# Altium PCB 单片机控制电路.PcbDoc
Units mil, origin at the board's own origin, x right, y up, seen from the top; angles counter-clockwise.
Board outline 4500 x 6000 mil, 2 copper layers (Top Layer, Bottom Layer); 28 components, 42 nets, 117 pads, 3 vias.
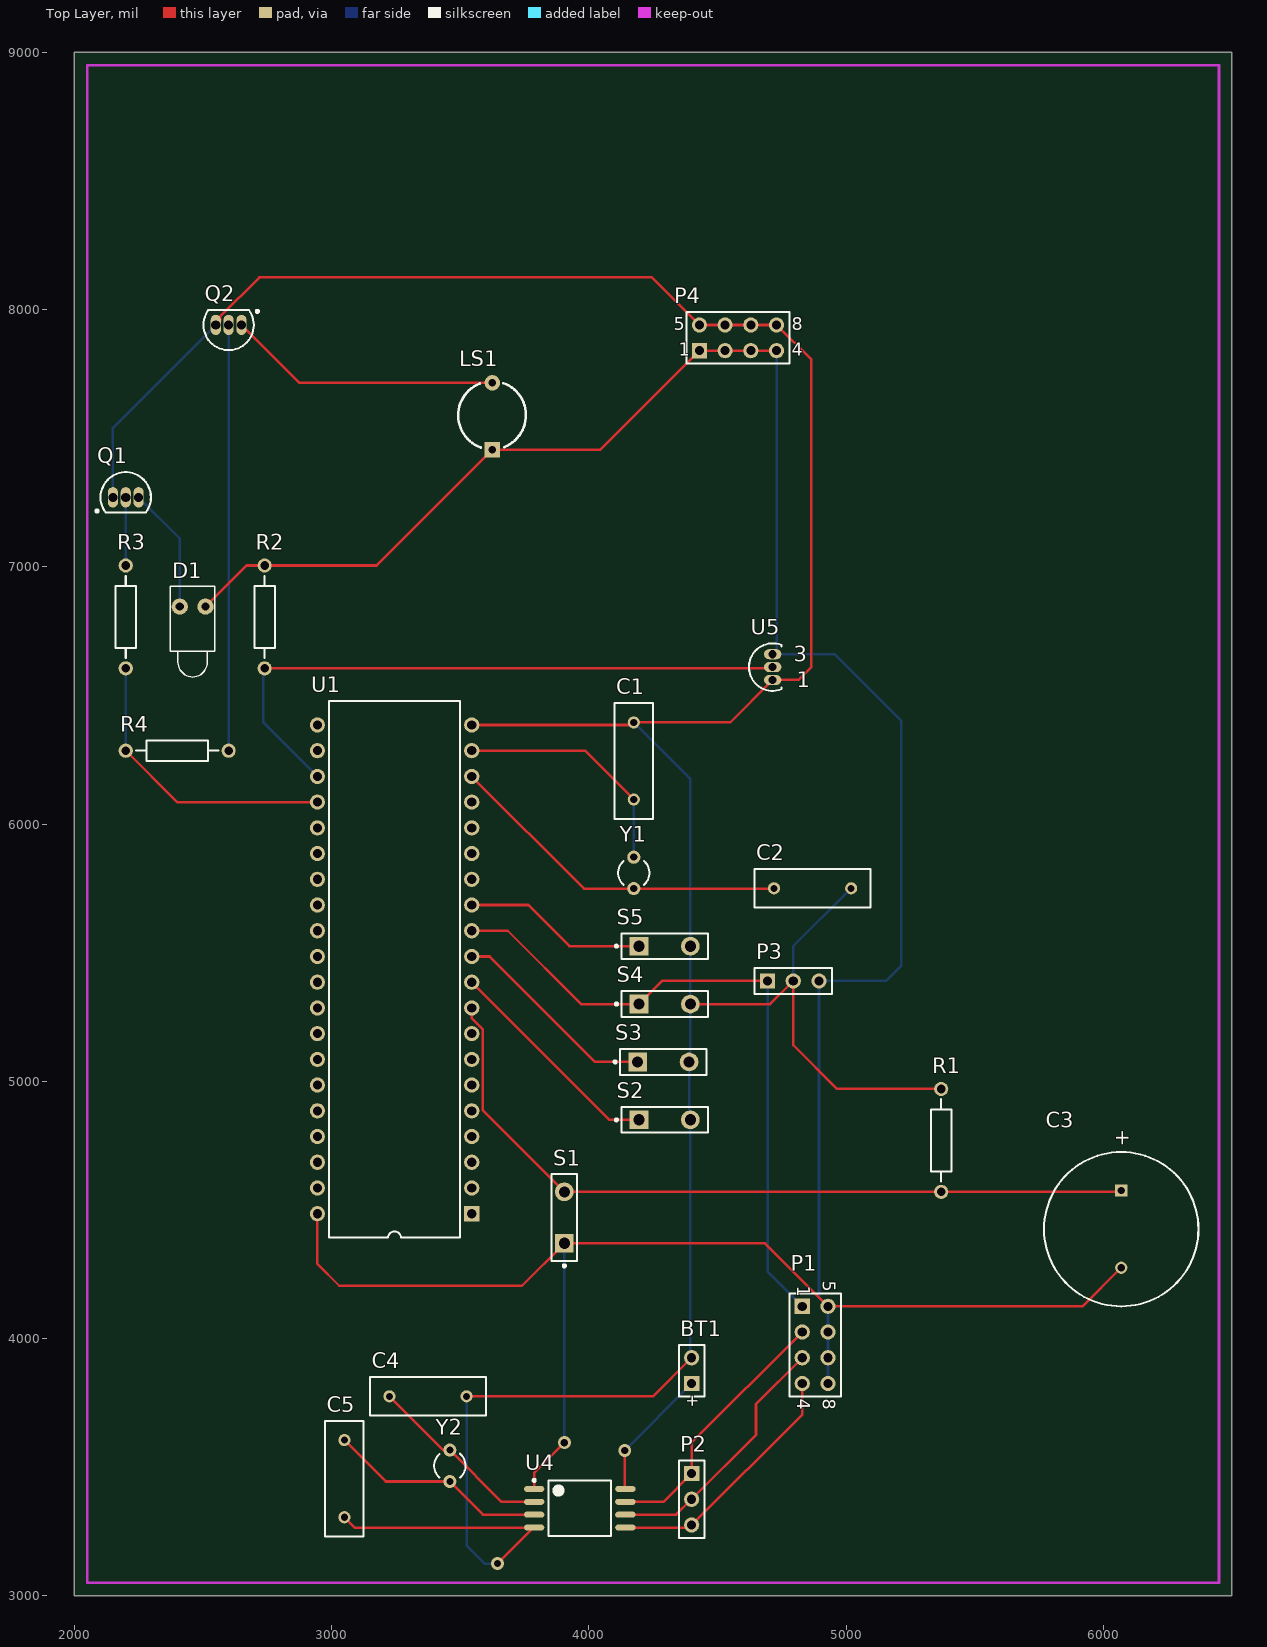
[diagram p0: Top Layer view]
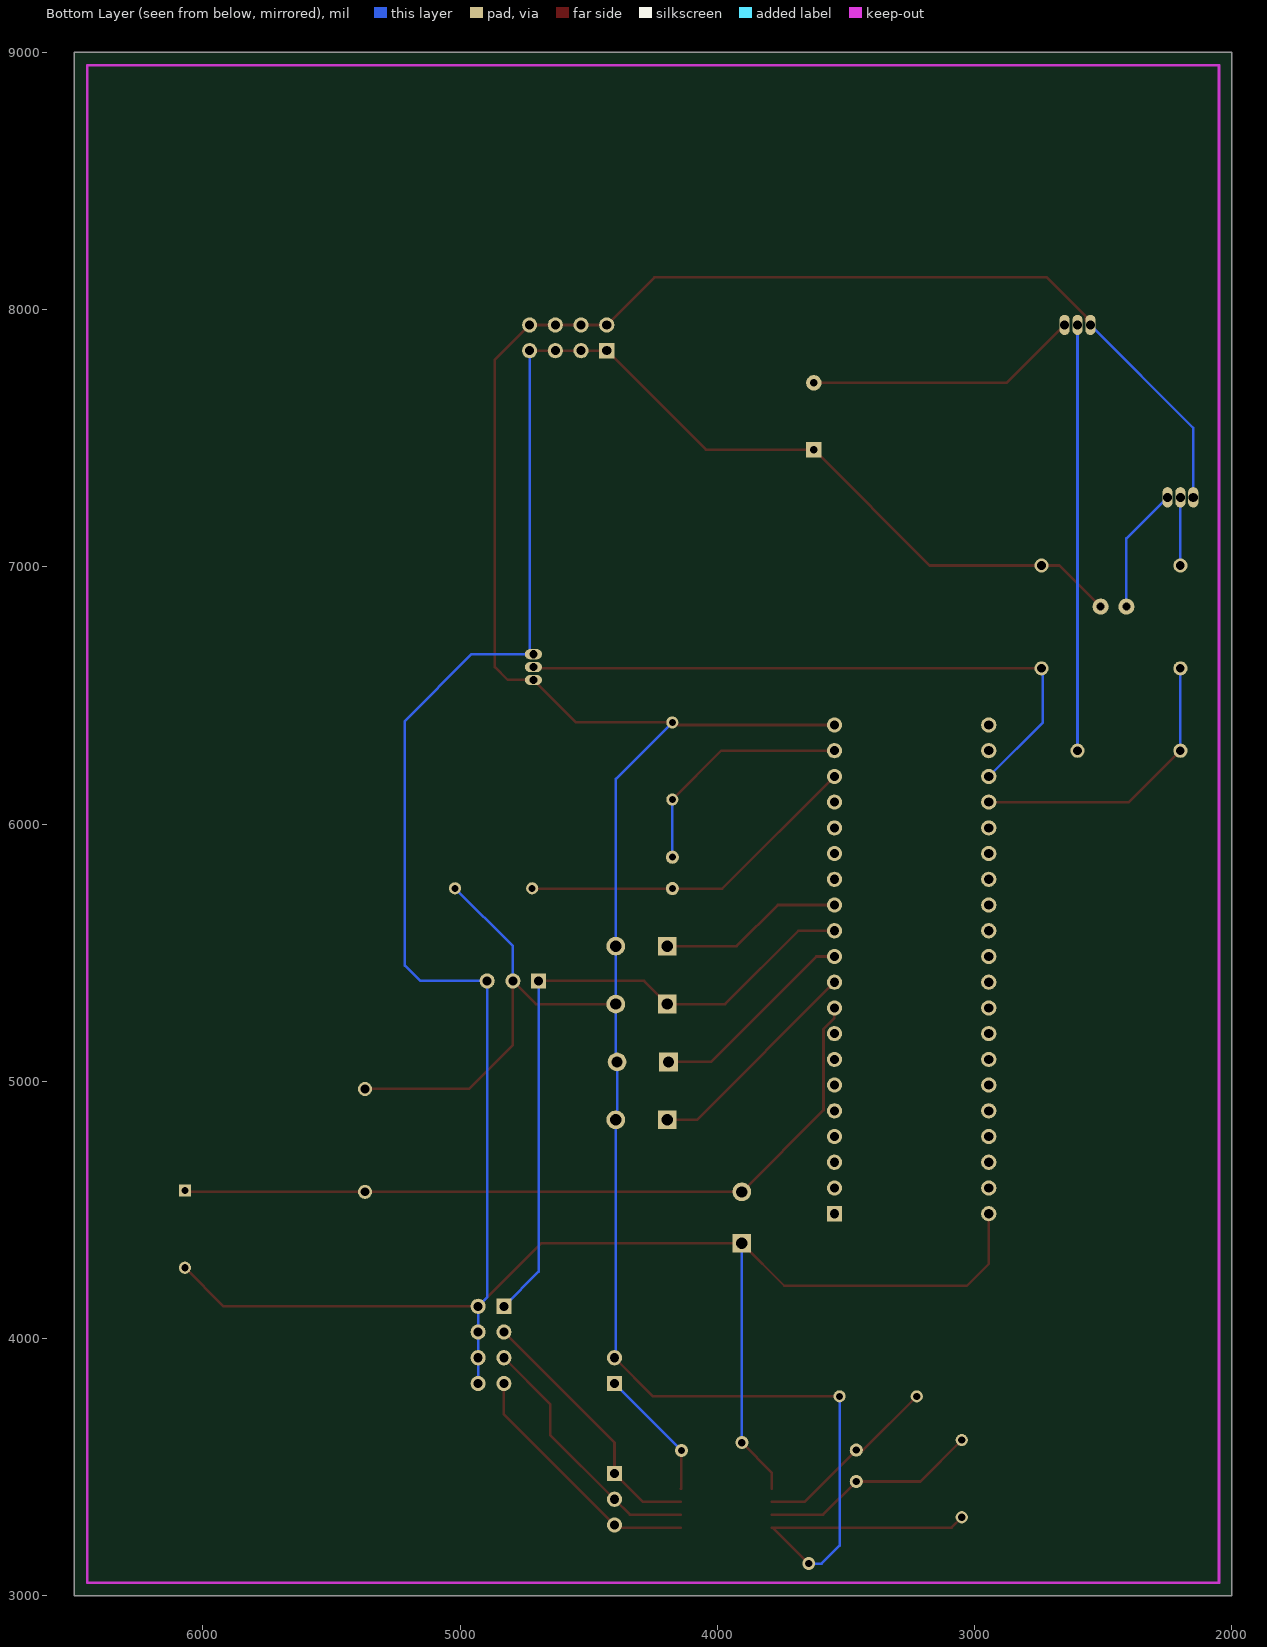
[diagram p1: Bottom Layer view, seen from below]

## Layer stack, top to bottom
Top Solder: solder mask 0.4, Solder Resist, Dk 3.5
Top Layer: signal copper 1.4
Dielectric 1: dielectric 12.6, FR-4, Dk 4.8
Bottom Layer: signal copper 1.4
Bottom Solder: solder mask 0.4, Solder Resist, Dk 3.5

## Board outline
2000,3000 6500,3000 6500,9000 2000,9000

## Design rules (kind name [scope] priority, off if disabled: settings)
Clearance [All] p1: gap=8
PolygonConnect [All] p1: connectstyle=Relief reliefconductorwidth=10 reliefentries=4 polygonreliefangle="90 Angle" airgapwidth=10
RoutingVias [All] p1: holewidth=28 width=50 viastyle="Through Hole" minholewidth=28 minwidth=50 maxholewidth=28 maxwidth=50
SolderMaskExpansion [All] p1: expansion=4
Width [All] p1: maxlimit=10 minlimit=10 preferedwidth=10
30 further rules are at their usual default settings.

## Classes and differential pairs
net class WE[1..8]: WE1 WE2 WE3 WE4 WE5 WE6 WE7 WE8
component class U_蜂鸣器: LS1 P4 Q2 R4
component class U_红外接收模块: P3
component class U_红外发射模块: D1 Q1 R3
component class U_独立按键: S2 S3 S4 S5
component class U_温度传感器模块: R2 U5
component class U_最小系统: C1 C2 C3 R1 S1 U1 Y1
component class U_时钟电路: BT1 C4 C5 P1 P2 U4 Y2

## Components (designator, comment, footprint, x,y, rotation, side; value= is the part's Value field where it differs from the comment)
BT1 "Battery" BAT-2 4400,3875 r90 top
C1 "Cap" RAD-0.3 4175,6245 r270 top
C2 "Cap" RAD-0.3 4870,5750 r180 top
C3 "Cap Pol1" RB7.6-15 6070,4425 r90 top
C4 "Cap" RAD-0.3 3375,3775 r0 top
C5 "Cap" RAD-0.3 3050,3455 r90 top
D1 "LED1" LED-1 2460,6845 r270 top
LS1 "Buzzer_有源" DIP6.6_2P 3625,7455 r90 top
P1 "Header 4X2A" HDR2X4_CEN 4830,4125 r270 top
P2 "Header 3" HDR1X3 4400,3475 r270 top
P3 "Header 3" HDR1X3 4695,5390 r0 top
P4 "Header 4X2A" HDR2X4_CEN 4430,7840 r0 top
Q1 "2N3904" TO-92A 2200,7270 r270 top
Q2 "2N3906" TO-92A 2600,7940 r90 top
R1 "Res2" AXIAL-0.4 5370,4770 r270 top
R2 "Res2" AXIAL-0.4 2740,6805 r90 top
R3 "Res2" AXIAL-0.4 2200,6805 r90 top
R4 "Res2" AXIAL-0.4 2400,6285 r0 top
S1 "SW-PB" SPST-2 3905,4470 r90 top
S2 "SW-PB" SPST-2 4295,4850 r0 top
S3 "SW-PB" SPST-2 4290,5075 r0 top
S4 "SW-PB" SPST-2 4295,5300 r0 top
S5 "SW-PB" SPST-2 4295,5525 r0 top
U1 "P89C52X2BN" SOT129-1 3245,5435 r90 top
U4 "DS1302" SOIC127P1030-8L 3965,3340 r0 top
U5 "DS1820" PR35 4715,6610 r0 top
Y1 "XTAL" R38 4175,5810 r0 top
Y2 "XTAL" R38 3460,3505 r180 top

## Footprints (in the part's own frame and the unit in brackets; to place one, negate y for a bottom-side part, rotate by r counter-clockwise, add the part's x,y. Pads: shape width x height; smd on the part's side, far side on the other; paste and mask are expansions set on the pad)
AXIAL-0.4 [mm] "Axial Device, Thru-Hole; 2 Leads; 0.4 in Pin Spacing"
  round 1.4 hole 0.85: 1(-5.08,0) 2(5.08,0)
  silkscreen extent -4.06,-1.02 4.06,1.02
BAT-2 [mm] "Battery; 2 Leads"
  rect 1.5x1.5 hole 0.9: 1(-1.27,0)
  round 1.5 hole 0.9: 2(1.27,0)
  silkscreen extent -2.54,-1.27 2.54,1.27
DIP6.6_2P [mil]
  rect 60x60 hole 30: 1(0,0)
  round 60 hole 30: 2(259.84,0)
  silkscreen extent 9,-131 259,133
HDR1X3 [mm] "Connector; Header; 3 Position"
  rect 1.5x1.5 hole 0.9: 1(0,0)
  round 1.5 hole 0.9: 2(2.54,0) 3(5.08,0)
  silkscreen extent -1.27,-1.27 6.35,1.27
HDR2X4_CEN [mm] "Connector; Header; 4x2 Position"
  rect 1.5x1.5 hole 0.9: 1(0,0)
  round 1.5 hole 0.9: 2(2.54,0) 3(5.08,0) 4(7.62,0) 5(0,2.54) 6(2.54,2.54) 7(5.08,2.54) 8(7.62,2.54)
  silkscreen extent -1.27,-1.27 8.89,3.81
LED-1 [mm] "LED; 2 Leads"
  round 1.6 hole 0.8: 1(0,1.27) 2(0,-1.27)
  silkscreen extent -2,-2.2 6.95,2.2
PR35 [mm] "TO, Flat Index; 3 In-Line, Axial Leads; Body Dia. 4.6mm; Leads 0.56 x 0.51 mm (max)"
  oval 1.7x1 hole 0.8: 1(0,-1.27) 2(0,0) 3(0,1.27)
  silkscreen extent -2.34,-2.35 0.85,2.35
R38 [mm] "Crystal, Thru-Hole; 2 Leads; Body 3.1 x 8.2 mm (Dia.xH)"
  round 1.3 hole 0.7: 1(0,1.55) 2(0,-1.55)
  silkscreen extent -1.55,-1.19 1.55,1.17
RAD-0.3 [mm] "Radial Cap, Thru-Hole; 2 Leads; 0.3 in Pin Spacing"
  round 1.2 hole 0.7: 1(-3.81,0) 2(3.81,0)
  silkscreen extent -5.71,-1.91 5.71,1.91
RB7.6-15 [mm] "Polarized Capacitor (Radial); 2 Leads"
  rect 1.2x1.2 hole 0.7: 1(3.81,0)
  round 1.2 hole 0.7: 2(-3.81,0)
  silkscreen extent -7.62,-7.62 7.62,7.62
SOIC127P1030-8L [mm]
  oval 2x0.6 smd: 1(-4.5,1.905) 2(-4.5,0.635) 3(-4.5,-0.635) 4(-4.5,-1.905) 5(4.5,-1.905) 6(4.5,-0.635) 7(4.5,0.635) 8(4.5,1.905)
  silkscreen extent -4.62,-2.75 3.1,2.88, body extent -3.75,-2.73 3.75,2.73, height 2.65
SOT129-1 [mm] "DIP, Plastic; 40 Leads; Row Spacing 15.24 mm; Pitch 2.54 mm"
  rect 1.5x1.5 hole 0.9: 1(-24.13,-7.62)
  round 1.5 hole 0.9: 2(-21.59,-7.62) 3(-19.05,-7.62) 4(-16.51,-7.62) 5(-13.97,-7.62) 6(-11.43,-7.62) 7(-8.89,-7.62) 8(-6.35,-7.62) 9(-3.81,-7.62) 10(-1.27,-7.62) 11(1.27,-7.62) 12(3.81,-7.62) 13(6.35,-7.62) 14(8.89,-7.62) 15(11.43,-7.62) 16(13.97,-7.62) 17(16.51,-7.62) 18(19.05,-7.62) 19(21.59,-7.62) 20(24.13,-7.62) 21(24.13,7.62) 22(21.59,7.62) 23(19.05,7.62) 24(16.51,7.62) 25(13.97,7.62) 26(11.43,7.62) 27(8.89,7.62) 28(6.35,7.62) 29(3.81,7.62) 30(1.27,7.62) 31(-1.27,7.62) 32(-3.81,7.62) 33(-6.35,7.62) 34(-8.89,7.62) 35(-11.43,7.62) 36(-13.97,7.62) 37(-16.51,7.62) 38(-19.05,7.62) 39(-21.59,7.62) 40(-24.13,7.62)
  silkscreen extent -26.5,-6.45 26.5,6.45
SPST-2 [mm] "Switch; 2 Leads"
  rect 1.85x1.85 hole 1.1: 1(-2.54,0)
  round 1.85 hole 1.1: 2(2.54,0)
  silkscreen extent -4.89,-1.27 4.28,1.27
TO-92A [mm] "TO, Flat Index; 3 In-Line, Axial Leads; Body Dia. 4.5mm; Leads 0.51 x 0.48 mm (max)"
  oval 2x1 hole 0.9: 1(0,-1.27) 2(0,0) 3(0,1.27)
  silkscreen extent -2.48,-2.95 1.5,2.48, body extent -2.48,-2.5 1.5,2.5, height 6.86

## Part data
BT1: "Multicell Battery"
C1 C2 C4 C5: "Capacitor"
C3: "Polarized Capacitor (Radial)"
D1: "Typical RED GaAs LED"
P1 P4: "Header, 4-Pin, Dual row"
P2 P3: "Header, 3-Pin"
Q1: "NPN General Purpose Amplifier"
Q2: "PNP General Purpose Amplifier"
R1 R2 R3 R4: "Resistor"
S1 S2 S3 S4 S5: "Switch"
U1: "80C51 8-Bit Flash Microcontroller Family, 8 kB Flash"
U5: "1-Wire Digital Thermometer"
Y1 Y2: "Crystal Oscillator"

## Via types
v1: diameter 50, hole 28, Top Layer to Bottom Layer, 3 vias

## Nets (pads, with @x,y where several pads share a name; then routed paths per layer and width w, separated by ;. In a path a pad name is that pad's centre, name@x,y a point inside that pad or via, vN(x,y) a via of type N, cw(c..) or ccw(c..) an arc to the next point about the centre after c; other vN are vias at no path point)
+5V: C3.2 D1.1 LS1.1 P1.5 P1.6 P1.7 P1.8 P3.3 P4.1 P4.2 P4.3 P4.4 R2.2 S1.1 U1.40 U4.1 U5.3 | length 11891.1
  Top Layer w10: D1.1 2670,7005 R2.2 3175,7005 LS1.1 4045,7455 P4.1 P4.2 P4.3 P4.4 ; U1.40 2945,4290 3030,4205 3740,4205 S1.1 4685,4370 P1.5 5920,4125 C3.2 ; U4.1 3787.83,3477.83 v1(3905,3595)
  Bottom Layer w10: v1(3905,3595) S1.1 ; P4.4 4730,6675 U5.3 4955,6660 5215,6400 5215,5450 5155,5390 P3.3 4895,4160 P1.5 P1.6 P1.7 P1.8
A: 
B: 
C: 
D: 
E: 
F: 
G: 
GND: BT1.2 C1.1 C2.1 C4.2 C5.1 P3.2 P4.5 P4.6 P4.7 P4.8 Q1.1 Q2.3 R1.1 S2.2 S3.2 S4.2 S5.2 U1.20 U4.4 U5.1 | length 12949.1
  Top Layer w10: Q2.3 2567.32,7957.31 2567.32,7973.22 2719.09,8125 4245,8125 P4.5 P4.6 P4.7 P4.8 4865,7805 4865,6610 4815,6560 U5.1 4550,6395 C1.1 4165,6385 U1.20 ; C5.1 3090,3265 U4.4@3785,3265 ; C4.2 4250,3775 BT1.2 ; v1(3645,3125) U4.4@3785,3265 ; U4.4 U4.4@3785,3265 ; S4.2 4705,5300 P3.2 4795,5140 4965,4970 R1.1
  Bottom Layer w10: Q1.1 2150,7540 Q2.3 ; C4.2 3525,3195 3595,3125 v1(3645,3125) ; C1.1 4395,6175 S5.2 S4.2 4395,5080 S3.2 4390,4855 S2.2 4395,3930 BT1.2 ; P3.2 4795,5525 C2.1
H: 
NetBT1_1: BT1.1 U4.8 | length 518.6
  Top Layer w10: v1(4140,3565) 4140,3417.17 U4.8
  Bottom Layer w10: v1(4140,3565) BT1.1
NetC1_2: C1.2 U1.19 Y1.1 | length 932.7
  Top Layer w10: U1.19 3985,6285 C1.2
  Bottom Layer w10: Y1.1 C1.2
NetC2_2: C2.2 U1.18 Y1.2 | length 1356
  Top Layer w10: U1.18 3981.02,5748.98 Y1.2 4718.98,5748.98 C2.2
NetC3_1: C3.1 R1.2 S1.2 U1.9 | length 3031.2
  Top Layer w10: U1.9 3545,5245.14 3587.53,5202.62 3587.53,4887.47 S1.2 R1.2 6065,4570 C3.1
NetC4_1: C4.1 U4.2 Y2.2 | length 732.7
  Top Layer w10: C4.1 3433.98,3566.02 Y2.2 3661.02,3365 U4.2
NetC5_2: C5.2 U4.3 Y2.1 | length 858
  Top Layer w10: C5.2 3211.02,3443.98 Y2.1 3588.98,3315 U4.3
NetD1_2: D1.2 Q1.3 | length 491.3
  Bottom Layer w10: Q1.3 2410,7110 D1.2
NetLS1_2: LS1.2 Q2.1 | length 1068.3
  Top Layer w10: Q2.1 2875.16,7714.84 LS1.2
NetP1_2: P1.2 P2.1 U4.7 | length 1031.5
  Top Layer w10: U4.7 4290,3365 P2.1 4400,3595 P1.2
NetP1_3: P1.3 P2.2 U4.6 | length 1010.8
  Top Layer w10: U4.6 4340,3315 P2.2 4650,3625 4650,3745 P1.3
NetP1_4: P1.4 P2.3 U4.5 | length 990.1
  Top Layer w10: U4.5 4390,3265 P2.3 4830,3705 P1.4
NetQ1_2: Q1.2 R3.2 | length 265
  Bottom Layer w10: R3.2 Q1.2
NetQ2_2: Q2.2 R4.2 | length 1655
  Bottom Layer w10: R4.2 Q2.2
P22/DS1820: R2.1 U1.23 U5.2 | length 2489.1
  Top Layer w10: R2.1@2735,6605 R2.1 4710,6605 U5.2
  Bottom Layer w10: R2.1@2735,6605 2735,6395 U1.23
P23: R3.1 R4.1 U1.24 | length 1147.8
  Top Layer w10: R4.1 2400,6085 U1.24
  Bottom Layer w10: R4.1 R3.1
P25: U1.26
P26: U1.27
P27: U1.28
P30/RXD: S2.1 U1.10 | length 871.6
  Top Layer w10: U1.10 4080,4850 S2.1
P31/RXD: S3.1 U1.11 | length 814.8
  Top Layer w10: U1.11 3615,5485 4025,5075 S3.1
P32/INT0: P1.1 P3.1 S4.1 U1.12 | length 2626.2
  Top Layer w10: U1.12 3685,5585 3970,5300 S4.1 4285,5390 P3.1
  Bottom Layer w10: P3.1 4695,4260 P1.1
P32/INT1: S5.1 U1.13 | length 716.3
  Top Layer w10: U1.13 3765,5685 3925,5525 S5.1
QH: 
VCC: U1.31
WE1: 
WE2: 
WE3: 
WE4: 
WE5: 
WE6: 
WE7: 
WE8: 
pads on no net: U1.1 U1.2 U1.3 U1.4 U1.5 U1.6 U1.7 U1.8 U1.14 U1.15 U1.16 U1.17 U1.21 U1.22 U1.25 U1.29 U1.30 U1.32 U1.33 U1.34 U1.35 U1.36 U1.37 U1.38 U1.39

## Keep-outs
Keep-Out Layer:
  lines w10: 2050,3050 2050,8950 6450,8950 6450,3050 2050,3050

## Silkscreen, mask and mechanical layers (free items; w line width, h text height)
Drill Drawing:
  text ".LEGEND" at 6700,3200 h60
  text "Drill Drawing." at 6700,3100 h60

## Dimensions
2050,3050 to 2050,8950 on Mechanical 1
2050,3050 to 6450,3050 on Mechanical 1

## Text inside footprints (layer, text, board x,y; h text height)
BT1: Top Overlay "+" at 4422.72,3730.51 h45.28 r90
C3: Top Overlay "+" at 6099.01,4745.15 h59.06 r90
P1: Top Overlay "5" at 4910,4225 h50 r270; Top Overlay "1" at 4810,4205 h50 r270; Top Overlay "4" at 4810,3765 h50 r270; Top Overlay "8" at 4910,3765 h50 r270
P4: Top Overlay "5" at 4330,7920 h50; Top Overlay "1" at 4350,7820 h50; Top Overlay "4" at 4790,7820 h50; Top Overlay "8" at 4790,7920 h50
U5: Top Overlay "1" at 4808.7,6531.26 h59.05; Top Overlay "3" at 4797.28,6630.47 h59.05